# EAGLE board PCI_Feverkill_100mm_USB_Mini_B (EAGLE 7.2.0)
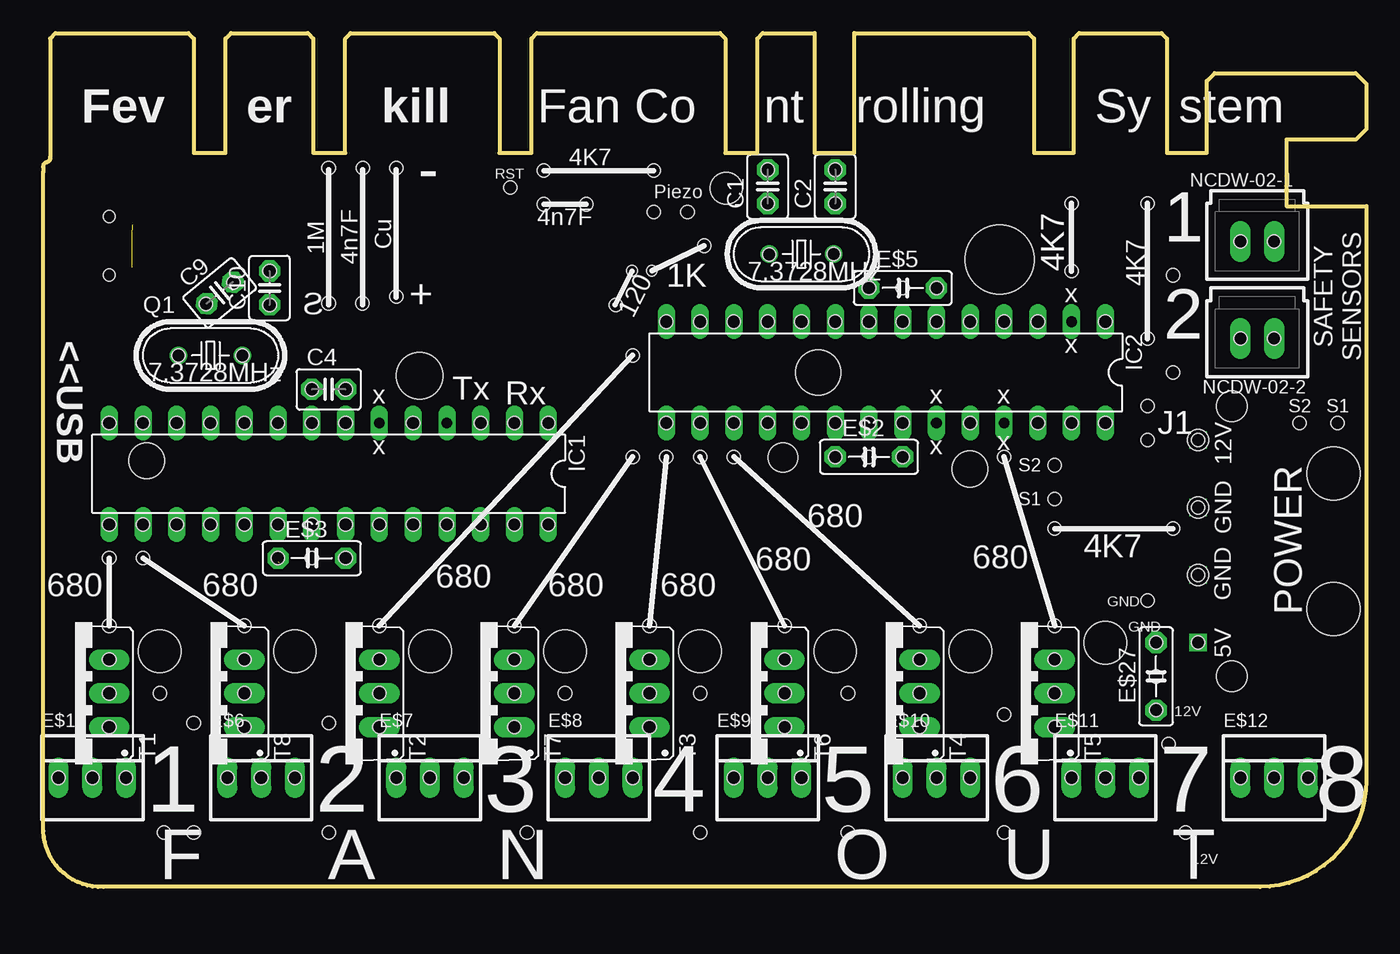
[diagram p0: board, top side]
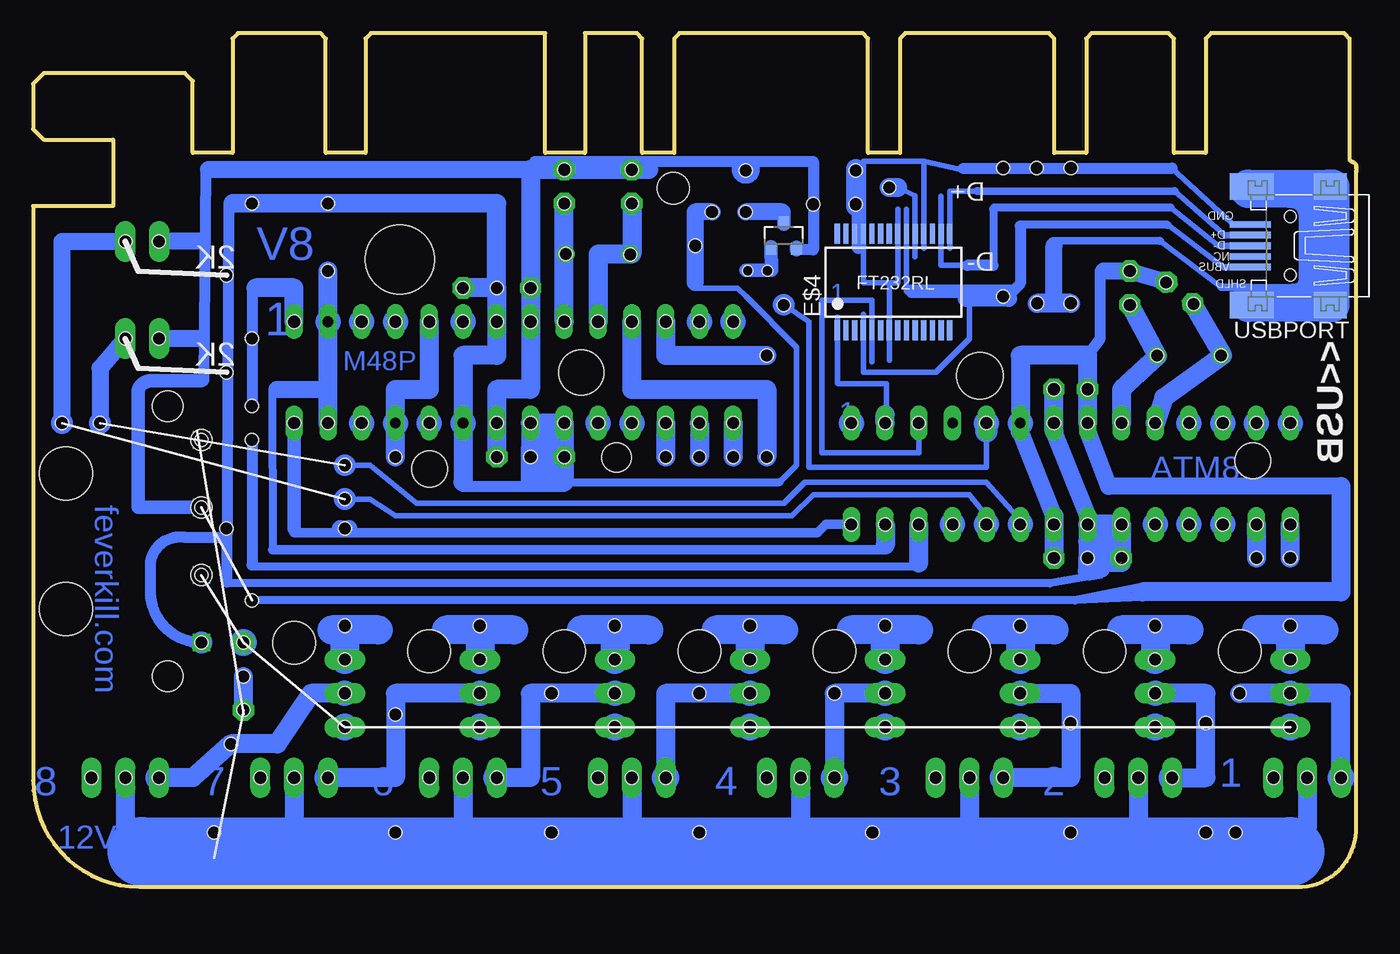
[diagram p1: board, bottom side, seen from below]

Size 99.52 x 64.19 mm. Coordinates in mm from the lower left corner, seen from the top.
Outline: 0.01,53.83 0.01,4.19 arc90 4.52,0 91.52,0 arc90 99.52,8 99.52,51.19 93.52,51.19 93.52,56.19 98.72,56.19 99.52,56.99 99.52,60.39 98.72,61.19 88.12,61.19 87.52,60.59 87.52,55.19 84.52,55.19 84.52,63.79 84.12,64.19 77.92,64.19 77.52,63.79 77.52,55.19 74.52,55.19 74.52,63.79 74.12,64.19 61.02,64.19 61.02,55.19 58.02,55.19 58.02,64.19 54.12,64.19 53.72,63.79 53.72,55.19 51.32,55.19 51.32,63.79 50.92,64.19 37.12,64.19 36.72,63.79 36.72,55.19 34.32,55.19 34.32,63.79 33.92,64.19 23.12,64.19 22.72,63.79 22.72,55.19 20.32,55.19 20.32,63.79 19.92,64.19 14.12,64.19 13.72,63.79 13.72,55.19 11.32,55.19 11.32,63.79 10.92,64.19 0.92,64.19 0.52,63.79 0.52,54.88 arc-90 0.26,54.5 arc90 0.01,54.06 0.01,53.75
Copper layers (1*16): Top 0.035mm / dielectric 1.5mm / Bottom 0.035mm
Design rules "default": minimum track width 10mil, minimum drill 24mil, track to track 8mil, track to pad 8mil, pad to pad 8mil, via to via 8mil, smd to smd 8mil, copper to edge 40mil, drill to drill 8mil, minimum pad ring 10mil, minimum via ring 8mil, stop-mask expansion 4mil, vias tented up to drill 0mil, thermal gap 10mil
Holes 1 mm at 76.09,26.94 77.36,46.31 76.09,19.64 65.93,19.64 55.77,19.64 45.61,19.64 35.45,19.64 25.29,19.64 15.13,19.64 4.97,19.64 7.51,24.72 4.97,24.72 46.88,32.34 49.42,32.34 51.96,32.34 44.34,39.96 44.34,32.34 84.98,26.94 26.55,54.04 26.56,44.39 21.47,43.88 24.01,43.88 21.47,54.04 24.03,54.07 14.29,45.45 12.25,43.83 17.03,43.77 17.03,46.31 15,39.95 10.17,39.96 15.13,34.88 17.67,34.88 54.5,51.39 54.5,53.93 59.58,53.93 59.58,51.39 59.45,47.58 54.61,47.56 57.04,42.5 59.58,42.5 62.12,42.5 20.21,34.88 22.75,34.88 4.97,34.88 7.51,34.88 10.05,34.88 12.59,34.88 27.83,34.88 35.45,34.88 37.99,34.88 37.99,27.26 35.45,27.26 32.91,27.26 30.37,27.26 27.83,27.26 25.29,27.26 22.75,27.26 20.21,27.26 17.67,27.26 15.13,27.26 12.59,27.26 10.05,27.26 7.51,27.26 4.97,27.26 46.88,34.88 49.42,34.88 51.96,34.88 54.5,34.88 57.04,34.88 59.58,34.88 62.12,34.88 64.66,34.88 69.74,34.88 74.82,34.88 77.36,34.88 79.9,34.88 79.9,42.5 74.82,42.5 72.28,42.5 69.74,42.5 67.2,42.5 64.66,42.5 54.5,42.5 49.42,42.5 46.88,42.5 4.97,17.1 4.97,14.56 4.97,12.02 15.13,12.02 15.13,14.56 15.13,17.1 25.29,17.1 25.29,14.56 25.29,12.02 35.45,12.02 35.45,14.56 35.45,17.1 45.61,17.1 45.61,14.56 45.61,12.02 55.77,12.02 55.77,14.56 55.77,17.1 65.93,17.1 65.93,14.56 65.93,12.02 76.09,12.02 76.09,14.56 76.09,17.1 17.67,24.72 22.75,24.72 83.07,41.23 83.07,51.39 77.36,51.39 59.58,32.34 64.66,32.34 83.07,36.15 83.07,33.61 35.12,52.6 62.12,32.34 20.21,24.72 22.75,37.42 20.21,37.42 62.12,45.04 64.66,45.04 67.2,45.04 84.98,45.99 84.98,38.69 94.5,34.88 97.36,34.88 1.16,8.21 3.7,8.21 6.24,8.21 13.86,8.21 16.4,8.21 18.94,8.21 64.66,8.21 67.2,8.21 69.74,8.21 26.56,8.21 29.1,8.21 31.64,8.21 39.26,8.21 41.8,8.21 44.34,8.21 51.96,8.21 54.5,8.21 57.04,8.21 77.36,8.21 79.9,8.21 82.44,8.21 90.06,8.21 92.6,8.21 95.14,8.21 83.71,18.37 83.71,13.29 43.06,43.77 76.09,31.7 76.09,29.16 83.71,15.83 37.66,53.87 37.66,51.33 40.84,51.33 45.92,53.87 8.78,14.56 11.32,12.34 9.09,4.08 11.32,4.08 21.48,12.34 21.48,4.08 39.26,14.56 36.4,4.08 49.42,14.56 49.42,4.08 60.53,14.56 60.53,4.08 72.28,12.97 72.28,4.08 85.93,4.08 84.66,10.75 72.28,32.34 83.07,21.55 51.96,42.5 32.91,34.88 45.92,50.75 48.46,50.75 49.73,48.21 90.06,48.53 92.6,48.53 92.6,41.23 90.06,41.23
Holes 3.2 mm at 18.94,17.73 29.1,17.73 39.26,17.73 69.74,17.73 8.78,17.73 49.42,17.73 59.58,17.73 79.9,18.37
Holes 1.6 mm at 86.88,33.61 86.88,28.53 86.88,23.45
Holes 0.8 mm at 45.78,46.34 44.29,46.35
Holes 5.2 mm at 71.94,47.19
Holes 3.5 mm at 28.3,38.42
Holes 2.7 mm at 69.7,31.42 7.79,32.05
Holes 3.4 mm at 58.29,38.68
Holes 2.2 mm at 55.65,32.28
Holes 2.4 mm at 51.38,52.53

## Footprints (pad centres in the part's own frame; a part is rotated, then mirrored left to right if it is on the bottom)
HC49U70 = drill 0.813: 1 -2.413,0; 2 2.413,0
C2.5-3 = drill 0.813 pad 1.6 octagon: 1 -1.27,0; 2 1.27,0
22-23-2031 = drill 1 long: 1 -2.54,0; 2 0,0; 3 2.54,0
C5B2.5 = drill 0.813 pad 1.6 octagon: 1 -2.54,0; 2 2.54,0
SSOP28 = smd 0.4 x 1.5: 1 -4.225,-3.625; 2 -3.575,-3.625; 3 -2.925,-3.625; 4 -2.275,-3.625; 5 -1.625,-3.625; 6 -0.975,-3.625; 7 -0.325,-3.625; 8 0.325,-3.625; 9 0.975,-3.625; 10 1.625,-3.625; 11 2.275,-3.625; 12 2.925,-3.625; 13 3.575,-3.625; 14 4.225,-3.625; 15 4.225,3.625; 16 3.575,3.625; 17 2.925,3.625; 18 2.275,3.625; 19 1.625,3.625; 20 0.975,3.625; 21 0.325,3.625; 22 -0.325,3.625; 23 -0.975,3.625; 24 -1.625,3.625; 25 -2.275,3.625; 26 -2.925,3.625; 27 -3.575,3.625; 28 -4.225,3.625
MOLEX_CSATL_FEKVO = drill 0.8 square: P$1 -7.62,0; P$2 -2.54,0; P$3 2.54,0; P$4 7.62,0 | hole 1: -7.62,0; -2.54,0; 2.54,0; 7.62,0 | hole 4: -5.08,10.16; 5.08,10.16 | hole 2.3: -10.16,2.54; 10.16,2.54
DIL28-3 = drill 0.813 long: 1 -16.51,-3.81; 2 -13.97,-3.81; 3 -11.43,-3.81; 4 -8.89,-3.81; 5 -6.35,-3.81; 6 -3.81,-3.81; 7 -1.27,-3.81; 8 1.27,-3.81; 9 3.81,-3.81; 10 6.35,-3.81; 11 8.89,-3.81; 12 11.43,-3.81; 13 13.97,-3.81; 14 16.51,-3.81; 15 16.51,3.81; 16 13.97,3.81; 17 11.43,3.81; 18 8.89,3.81; 19 6.35,3.81; 20 3.81,3.81; 21 1.27,3.81; 22 -1.27,3.81; 23 -3.81,3.81; 24 -6.35,3.81; 25 -8.89,3.81; 26 -11.43,3.81; 27 -13.97,3.81; 28 -16.51,3.81
SOT23 = smd 0.8 x 0.9: 1 -0.95,-1; 2 0.95,-1; 3 0,1
70543-02 = drill 1.016 long: 1 -1.27,0; 2 1.27,0
TO220BV = drill 1.016 long: 1 -2.54,-2.54; 2 0,-2.54; 3 2.54,-2.54
32005-301 = smd 3.1 x 0.5: 1 3,1.6; 2 3,0.8; 3 3,0; 4 3,-0.8; 5 3,-1.6 | smd 2.5 x 2: M1 -3,-4.45; M2 -3,4.45 | smd 3.3 x 2: M3 2.9,4.45; M4 2.9,-4.45 | hole 0.9: 0,2.2; 0,-2.2

## Placement (x,y rotation side)
-  [HC49U70]  57.04,47.58 0 top
C1  [C2.5-3]  54.5,52.66 90 top
C2  [C2.5-3]  59.58,52.66 90 top
C4  [C2.5-3]  21.48,37.42 0 top
C9  [C2.5-3]  13.28,44.67 39.4 top
C10  [C2.5-3]  17.03,45.04 90 top
E$1  [22-23-2031]  3.7,8.21 0 top
E$2  [C5B2.5]  62.12,32.34 0 top
E$3  [C5B2.5]  20.21,24.72 0 top
E$4  [SSOP28]  34.81,45.48 0 bottom
E$5  [C5B2.5]  64.66,45.04 0 top
E$6  [22-23-2031]  16.4,8.21 0 top
E$7  [22-23-2031]  29.1,8.21 0 top
E$8  [22-23-2031]  41.8,8.21 0 top
E$9  [22-23-2031]  54.5,8.21 0 top
E$10  [22-23-2031]  67.2,8.21 0 top
E$11  [22-23-2031]  79.9,8.21 0 top
E$12  [22-23-2031]  92.6,8.21 0 top
E$13  [MOLEX_CSATL_FEKVO]  86.88,25.99 270 top
E$27  [C5B2.5]  83.71,15.83 90 top
IC1  Mega8-P  [DIL28-3]  21.48,31.07 180 top
IC2  Mega48P  [DIL28-3]  63.39,38.69 180 top
LFET  [SOT23]  43.07,48.97 0 bottom
NCDW-02-1  [70543-02]  91.33,48.53 180 top
NCDW-02-2  [70543-02]  91.33,41.23 180 top
Q1  [HC49U70]  12.59,39.96 0 top
T1  [TO220BV]  2.43,14.56 90 top
T2  [TO220BV]  22.75,14.56 90 top
T3  [TO220BV]  43.07,14.56 90 top
T4  [TO220BV]  63.39,14.56 90 top
T5  [TO220BV]  73.55,14.56 90 top
T6  [TO220BV]  53.23,14.56 90 top
T7  [TO220BV]  32.91,14.56 90 top
T8  [TO220BV]  12.59,14.56 90 top
USBPORT  MOLEX 675031020 (Mini B)  [32005-301]  4.97,48.21 180 bottom

## Library data of the parts
- Q1 = crystal; OC_FARNELL: unknown; OC_NEWARK: unknown
C1 C2 C4 C9 C10 E$2 E$3 E$5 E$27 = capacitor-wima
E$1 E$6-E$12 NCDW-02-1 NCDW-02-2 = con-molex
E$4 = ftdichip
E$13 = MolexCsati
IC1 IC2 = ic-package
LFET = on-semiconductor
T1-T8 = transistor-neu-to92
USBPORT = con-cypressindustries

## Nets
S$2: C2.1
S$3: C1.1
S$5: C10.1
S$6: C9.1
S$7: E$1.1 T1.2
S$10: T1.3
S$11: T8.3
S$12: T2.3
S$13: T7.3
S$14: T3.3
S$15: T6.3
S$16: T4.3
S$17: T5.3
S$18: E$6.1
S$26: E$7.1 T2.2
S$33: E$8.1 T7.2
S$36: C9.2
S$42: E$9.1 T3.2
S$65: E$10.1 T6.2
S$73: C1.2 C2.2
S$75: NCDW-02-2.1
S$79: E$13.P$4
S$86: E$13.P$2
S$165: E$11.1 T4.2
S$168: E$12.1 T5.2
S$174: E$1.2
S$175: E$6.2
S$176: E$7.2
S$177: E$8.2
S$178: E$9.2
S$179: E$10.2
S$180: E$11.2
S$181: E$12.2

## Tracks (layer width: path | path; a pad name or v marks a point on that pad's centre or on a via)
GND
  Bottom 1.27: 1.16,30.12 18.62,30.12 20.21,34.24
  Bottom 1.422: 1.16,30.12 1.16,22.18 16.08,22.18
N$1
  Bottom 1.422: 64.66,45.04 64.66,51.39 84.49,51.39 | 64.66,45.04 67.2,45.04 | 64.66,45.04 64.66,39.96 67.2,39.96 67.2,30.44
S$1
  Bottom 0.7: 35.45,25.35 81.5,25.35
S$2
  Bottom 1.422: 59.58,42.5 C2.1
S$3
  Bottom 1.422: C1.1 54.5,47.58 57.04,47.58 57.04,42.5
S$4
  Bottom 0.61: 23.06,22.81 84.98,22.81
S$5
  Bottom 1.422: C10.1 14.95,39.92 17.67,37.42 17.67,34.88
S$6
  Bottom 0.305: 10.05,39.96 10.68,39.96
  Bottom 1.422: C9.1 10.05,39.96 14.49,36.78 15.13,34.88
S$7
  Bottom 1.422: E$1.1 1.16,14.56 T1.2 8.78,14.56
S$8
  Bottom 1.422: 4.97,24.72 4.97,27.26
S$9
  Bottom 1.422: 7.51,27.26 7.51,24.72
S$10
  Bottom 2.184: 4.97,18.37 T1.3
S$11
  Bottom 2.184: 15.13,19.32 T8.3
S$12
  Bottom 2.184: 25.29,19.32 T2.3
S$13
  Bottom 2.184: 35.45,19.32 T7.3
S$14
  Bottom 2.184: 45.61,19.32 T3.3
S$15
  Bottom 2.184: 55.77,19.32 T6.3
S$16
  Bottom 2.184: 65.93,19.32 T4.3
S$17
  Bottom 2.184: 76.09,19.32 T5.3
S$18
  Bottom 1.422: E$6.1 11.32,8.21 11.32,14.56 15.13,14.56
S$19
  Bottom 1.422: 44.34,32.34 44.34,37.42 54.5,37.42 54.5,42.5
S$20
  Bottom 1.422: 51.96,42.5 51.96,39.96 44.34,39.96
S$21
  Bottom 1.422: 46.88,34.88 46.88,32.34
S$22
  Bottom 1.422: 49.42,34.88 49.42,32.34
S$23
  Bottom 1.422: 51.96,34.88 51.96,32.34
S$24
  Bottom 1.422: 69.74,42.5 69.74,37.42 72.28,37.42 72.28,32.34
S$25
  Bottom 2.184: 32.91,19.32 37.99,19.32
S$26
  Bottom 1.422: T2.2 21.48,14.56 21.48,8.21 E$7.1
S$27
  Bottom 0.406: 35.35,35.95 35.35,37.85 38.95,37.85
S$28
  Bottom 0.7: 37.99,27.26 39.89,27.26 40.53,26.62 79.9,26.62
S$29
  Bottom 0.813: 29.57,54.03 13.85,54.04
S$30
  Bottom 0.406: 32.54,54.55 32.54,48.04
S$31
  Bottom 1.27: 22.75,44.09 22.75,48.21
S$32
  Bottom 0.406: 34.49,50.97 34.49,45.44 35.14,45.44 | 35.14,45.44 35.14,39.59 | 29.85,53.95 32.52,54.55 37.09,54.55 37.09,45.44 35.14,45.44
S$33
  Bottom 1.422: T7.2 39.26,14.56 E$8.1
S$34
  Bottom 1.27: 43.19,50.75 45.92,50.75
S$35
  Bottom 2.184: 2.43,19.32 7.51,19.32
S$36
  Bottom 1.27: C9.2 16.94,46.26
S$37
  Bottom 1.422: 21.47,43.88 24.01,43.88
S$38
  Bottom 0.406: 36.45,44.11 40.21,44.11 40.21,32.66 32.91,32.66 32.91,34.3
S$39
  Bottom 0.406: 39.04,42.84 39.05,37.89
S$40
  Bottom 0.406: 33.19,47.39 33.19,51.95 34.49,52.61
  Bottom 1.422: 35.14,52.61 34.49,52.61
S$41
  Bottom 1.27: 32.93,35.55 32.91,34.21
S$42
  Bottom 1.422: T3.2 51.96,14.56 E$9.1
S$43
  Bottom 0.406: 30.59,48.04 30.57,52.3 27.97,52.3
S$44
  Bottom 2.184: 12.59,19.32 17.67,19.32
S$45
  Bottom 1.422: 35.45,34.88 35.45,35.52
S$46
  Bottom 0.61: 16.14,22.58 21.16,21.55 | 16.33,21.87 21.16,21.55 | 16.04,21.77 21.16,21.55
S$48
  Bottom 1.016: 44.03,46.35 45.93,46.35
S$49
  Bottom 0.406: 33.84,50.97 33.84,44.79 33.43,44.79
  Bottom 1.016: 25.99,44.79 33.43,44.79
S$51
  Bottom 0.406: 31.24,51.94 31.24,46.74 29.29,46.74
  Bottom 0.61: 27.31,50.97 27.31,46.74
  Bottom 0.813: 27.31,46.74 29.29,46.74
S$53
  Bottom 1.27: 48.46,50.75 49.73,50.75 49.73,45.44
S$54
  Bottom 0.406: 27.83,34.24 27.83,31.55 41.16,31.55 41.16,42.5 43.07,43.77
  Bottom 1.676: 27.83,34.88 27.83,34.24
S$55
  Bottom 1.27: 26.15,44.24 29.34,44.25
S$56
  Bottom 1.422: 35.45,27.26 35.42,27.26 35.42,25.71
S$57
  Bottom 1.422: 32.91,27.27 32.92,27.27 32.92,24.38
S$58
  Bottom 1.27: 81.18,37.42 77.36,37.42
  Bottom 1.422: 77.36,34.88 77.36,37.42 77.36,46.31
S$59
  Bottom 0.61: 81.48,25.45 81.5,37.41
S$60
  Bottom 0.813: 83.07,45.04 83.07,36.15
S$61
  Bottom 0.813: 83.06,33.66 83.06,24.2
S$62
  Bottom 0.406: 36.44,39.49 36.44,44.11
S$63
  Bottom 0.406: 39.04,42.19 39.04,41.54
S$64
  Bottom 0.406: 29.1,43.77 29.1,41.23 31.64,38.69 37.08,38.7
S$65
  Bottom 1.422: T6.2 62.12,14.56 62.12,8.21 E$10.1
S$68
  Bottom 1.016: 44.01,48.12 44,46.37
S$69  (1 unrouted)
  Bottom 1.422: 17.67,25.67 17.67,24.72 | 17.67,24.72 17.67,24.4 | 17.67,24.72 18.94,24.72 | 18.94,24.72 19.22,23.94 20.24,23.74 20.21,25.99 | 18.94,24.72 18.94,25.99 | 18.94,25.99 17.67,25.99 17.67,27.26 20.21,27.26 20.21,25.99 | 18.94,25.99 20.21,25.99 | 17.74,24.39 19.01,24.39
S$70
  Bottom 1.016: 37.44,51.34 37.44,48.09
S$71
  Bottom 0.813: 42.11,47.9 40.84,47.9 40.84,54.56 45.29,54.56 | 61.8,54.56 45.29,54.56 | 45.29,54.56 45.29,53.93 arc90 45.92,53.3 arc90 46.56,53.93 46.56,54.25
S$72
  Bottom 1.27: 97.36,48.53 92.6,48.53
S$73
  Bottom 1.016: 62.12,53.93 C2.2 55.77,53.93
  Bottom 1.27: 62.12,53.93 86.33,53.93
  Bottom 1.422: 53.23,53.93 C1.2 55.77,53.93 62.12,53.93 62.12,37.42 64.66,37.42 64.66,32.34
S$74
  Bottom 2.184: 22.75,19.32 27.83,19.32
S$75
  Bottom 1.27: 94.5,39.01 NCDW-02-2.1
S$76
  Bottom 1.27: 86.88,41.23 90.06,41.23
S$77
  Bottom 1.27: 86.88,48.53 90.06,48.53
S$78
  Bottom 1.27: 97.36,34.88 97.36,48.21
S$79
  Bottom 0.813: 84.98,26.31 88.15,26.31 arc-90 90.69,24.4 90.69,22.18 arc-90 E$13.P$4
S$80
  Bottom 0.813: 86.56,53.93 86.7,38.03
S$81
  Bottom 0.813: 84.81,51.31 84.96,22.92
S$82
  Bottom 1.422: 79.9,42.5 79.9,45.04 82.75,45.04
S$84  (4 unrouted)
  Bottom 0.4: 6.71,47.41 8.94,47.41
  Bottom 0.5: 6.72,49.81 9.26,49.81 | 6.71,49.01 9.89,49.01 | 6.7,48.21 10.28,48.21 | 6.69,46.61 9.96,46.61
S$85
  Bottom 0.406: 13.86,54.05 9.4,49.95
S$86
  Bottom 1.016: 86.88,38.05 90.69,38.05 arc-90 91.64,37.1 91.64,28.53 E$13.P$2
S$87
  Bottom 0.406: 9.89,49.01 13.66,52.32
  Bottom 0.61: 28.51,52.34 13.66,52.32
S$88
  Bottom 0.406: 10.36,48.21 13.97,51.07
  Bottom 0.61: 13.97,51.07 27.24,51.07
S$89
  Bottom 0.406: 10.05,46.63 14.18,49.78
  Bottom 0.61: 14.18,49.78 25.29,49.8
S$90
  Bottom 0.406: 10.16,45.1 14.77,48.58
  Bottom 0.61: 14.77,48.58 22.75,48.53
S$91
  Bottom 0.813: 25.28,49.7 25.29,45.36 25.92,44.72
S$92
  Bottom 1.27: 17.03,46.3 17.03,46.31 19.02,46.31
S$93
  Bottom 2.54: 1.79,52.66 1.79,43.77 8.14,43.77 8.14,44.09 4.65,44.09 arc-90 3.06,45.67 3.06,50.44 arc-90 4.97,52.34 8.14,52.34 arc90 8.14,52.66 2.11,52.66
S$94
  Bottom 0.61: 8.14,45.04 10.16,45.1
S$162
  Bottom 1.27: 94.5,39.01 94.5,34.88
S$163
  Bottom 2.184: 63.39,19.32 68.47,19.32
S$164
  Bottom 2.184: 73.55,19.32 77.04,19.32
S$165
  Bottom 1.422: T4.2 72.28,14.56 72.28,8.21 E$11.1
S$167
  Bottom 2.184: 53.23,19.32 58.31,19.32
S$168
  Bottom 1.422: T5.2 78.63,14.56 81.17,10.75 84.66,10.75 87.52,8.21 E$12.1
S$169
  Bottom 2.184: 43.07,19.32 48.15,19.32
S$170
  Bottom 1.422: 83.71,13.61 83.71,15.83
S$172
  Bottom 0.813: 45.92,54.25 45.92,53.93
S$173
  Bottom 0.61: 19.57,23.45 23.06,22.81
S$174
  Bottom 1.422: E$1.2 3.7,4.4
S$175
  Bottom 1.422: E$6.2 16.4,4.4
S$176
  Bottom 1.422: E$7.2 29.1,4.4
S$177
  Bottom 1.422: E$8.2 41.8,4.4
S$178
  Bottom 1.422: E$9.2 54.5,4.4
S$179
  Bottom 1.422: E$10.2 67.2,4.4
S$180
  Bottom 1.422: E$11.2 79.9,4.4
S$181
  Bottom 1.422: E$12.2 92.6,4.4
S$182
  Bottom 5.2: 91.34,2.66 4.98,2.66
S$183
  Bottom 1.016: 43.04,50.72 43.06,49.83
S$184
  Bottom 1.016: 42.11,48.09 42.11,47.93
S$185
  Bottom 0.406: 25.29,27.58 27.83,30.44 41.48,30.44 43.07,28.85 70.69,28.85 74.18,31.7 76.09,31.7
S$186
  Bottom 0.406: 27.83,27.89 29.1,29.48 40.84,29.48 42.43,27.89 72.28,27.89 74.18,29.16 76.09,29.16
S$187
  Bottom 1.27: 76.4,26.94 75.77,26.94
S$188
  Bottom 0.813: 20.21,39.96 19.25,41.23 19.25,46.31
  Bottom 1.27: 22.75,27.89 25.29,34.24
  Bottom 1.422: 22.75,27.89 22.75,24.72 | 20.21,34.88 20.21,39.96 25.29,39.96 25.29,34.24
S$189
  Bottom 1.27: 20.21,27.89 22.75,34.24
  Bottom 1.422: 22.75,34.24 22.75,37.42
S$191
  Bottom 1.016: 79.9,34.88 79.9,26.94
S$192
  Bottom 1.422: 59.89,33.93 61.48,33.93
S$193
  Bottom 0.406: 37.08,38.69 37.08,43.06
S$194
  Bottom 0.61: 32.59,24.09 83.07,24.09
S$195
  Bottom 0.406: 43.38,30.44 42.11,31.7 42.11,40.59 45.92,44.41 46.53,45.02 49.77,45.02
  Bottom 0.61: 59.89,30.44 43.38,30.44
  Bottom 1.422: 59.58,31.7 59.58,30.44 59.89,30.44 62.12,30.44 62.12,31.7 | 62.12,31.7 59.58,31.7 | 59.58,32.98 59.58,31.7 | 62.12,32.98 59.58,32.98 | 62.12,31.7 62.12,32.98 | 59.58,32.98 59.58,34.88 62.12,34.88 62.12,32.98
S$197
  Bottom 1.422: 37.66,54 37.66,51.15
S$198
  Bottom 0.813: 67.2,30.12 59.58,30.12
S$201
  Bottom 0.61: 21.16,21.55 83.07,21.55
(copper drawn outside any net)
  shapes: Bottom area x2, Bottom circle x56, Top circle x1

## Text on the board
Bottom: V8 | 1 | 1 | M48P | 1 | ATM8 | feverkill.com | 1 | 2 | 3 | 4 | 5 | 6 | 7 | 8 | 12V
tPlace: rolling | Fev | er | kill | Fan Co | nt | Sy stem | 4K7 | RST | Piezo | - | 4n7F | 4n7F | 1 | 1M | Cu | 120 | 7.3728MHz | 4K7 | 1K | 4K7 | + | x | SAFETY / SENSORS | S | <<USB | 2 | x | 7.3728MHz | Tx | x | Rx | x | x | S2 | S1 | J1 | x | x | x | POWER | S2 | S1 | 680 | 4K7 | 680 | 680 | 680 | 680 | 680 | 680 | 680 | GND | GND | 12V | 1 | 2 | 3 | 4 | 5 | 6 | 7 | 8 | 12V | F | A | N | O | U | T
bPlace: D+ | GND | D+ | D- | NC | 2K | VBUS | D- | SHLD | FT232RL | <<USB | 2K